# Altium PCB ESP32C6_module.PcbDoc (part 2 of 2)
Units mm, origin at the board's own origin, x right, y up, seen from the top; angles counter-clockwise.
Board outline 36.3 x 28.14 mm, 4 copper layers (TOP, GND, VCC, BOT), stack 1.586 mm thick; 77 components, 53 nets, 289 pads, 241 vias.
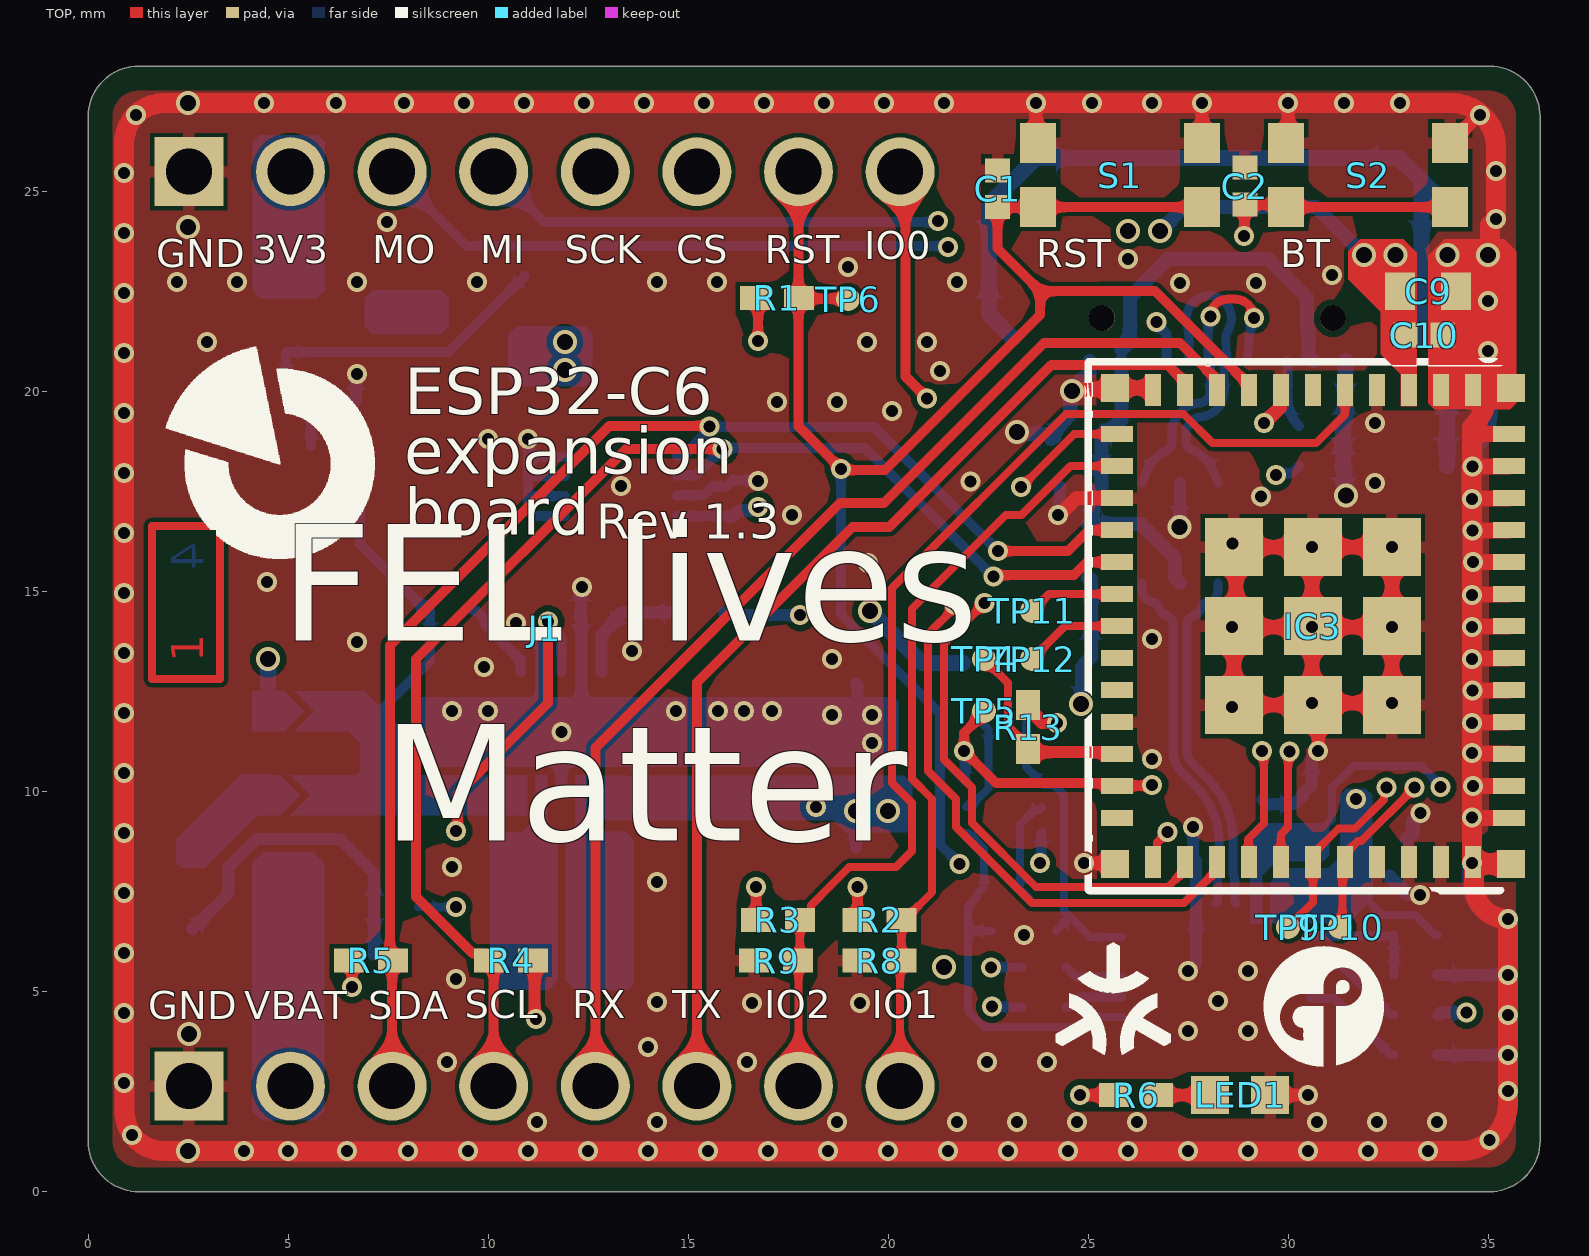
[diagram p0: TOP view]

## Via types
v1: diameter 0.5, hole 0.3, TOP to BOT, tented both sides, 203 vias
v2: diameter 0.6, hole 0.4, TOP to BOT, tented both sides, 22 vias
v3: diameter 0.5, hole 0.3, TOP to BOT, 16 vias

## Nets (pads, with @x,y where several pads share a name; then routed paths per layer and width w, separated by ;. In a path a pad name is that pad's centre, name@x,y a point inside that pad or via, vN(x,y) a via of type N, cw(c..) or ccw(c..) an arc to the next point about the centre after c; other vN are vias at no path point) (continued)
USB2_N: IC4.4 IC6.5 | length 8.8
  BOT w0.222: IC4.4 28.25,15.034 cw(c27.927,15.034) 28.155,14.805 cw(c27.927,15.034) 27.927,14.711 27.873,14.662 ccw(c28.022,14.497) 27.807,14.551 cw(c27.6,14.6) 27.646,14.393 ccw(c27.696,14.176) 27.474,14.176 27.474,13.951 27.474,11.004 ccw(c27.904,11.004) 27.475,10.983 ccw(c27.904,11.004) 27.492,10.883 ccw(c27.904,11.004) 27.6,10.7 27.995,10.305 cw(c26.477,8.786) 28.624,8.786 28.624,7.923 ccw(c28.687,7.923) 28.643,7.878 cw(c28.598,7.834) 28.661,7.834 28.661,7.294 ccw(c28.794,7.294) IC6.5
USB2_P: IC4.6 IC6.4 | length 8.8
  BOT w0.222: IC4.6 26.35,15.034 ccw(c26.673,15.034) 26.445,14.805 ccw(c26.673,15.034) 26.673,14.711 26.727,14.662 cw(c26.578,14.497) 26.793,14.55 ccw(c27,14.6) 26.933,14.398 26.974,14.385 cw(c26.904,14.174) 27.126,14.176 27.126,13.951 27.126,11.004 27.126,11.002 ccw(c27.9,11.002) 27.352,10.455 27.698,10.109 cw(c26.302,8.714) 28.276,8.714 28.276,7.923 cw(c28.213,7.923) 28.257,7.878 ccw(c28.302,7.834) 28.239,7.834 28.239,7.294 cw(c28.106,7.294) IC6.4
VBAT: J1.10 Q3.3
VBUS: C11.2 D3.1 FB1.1 IC4.5 J3.A4/B9 J3.B4/A9 | length 15.9
  BOT w0.35: FB1.1 FB1.1@25.025,16.675 ; C11.2 25.275,17.525 25.122,17.372 25.122,16.772 FB1.1@25.025,16.675 ; C11.2@25.333,17.617 25.333,18.933 25.425,19.025 25.566,19.025 25.83,19.289 J3.A4/B9 ; J3.A4/B9@25.83,21.025 26.053,21.249 26.053,22.353 27,23.3 29.513,23.3 30.47,22.343 30.47,21.556 30.505,21.521 30.505,20.875 J3.B4/A9 ; IC4.5 27.175,15.325 27.175,15.825 26.325,16.675 FB1.1@25.025,16.675
VIN: C4.1 IC2.5 IC2.8 R7.2 R11.1 SB1.2 SB2.2 TP1.1 | length 18.5
  TOP w0.25: v1(9.2,9) 9.241,9.041 9.241,9.941 11.5,12.2 v1(11.5,14.242)
  BOT w0.25: SB1.2@5.901,12.001 6.051,12.001 ; R11.1 6.8,16.175 8.475,14.5 R7.2 8.55,13.25 7.3,12 TP1.1 ; v1(9.2,9) 9.248,9.048 9.248,9.695 C4.1 ; v1(11.5,14.242) 11.5,14.174 11.831,13.844 IC2.8
pads on no net: IC3.6 IC3.19 IC3.20 IC3.24 IC6.1 IC6.2 IC6.10 IC6.12 IC6.13 IC6.14 IC6.15 IC6.16 IC6.17 IC6.18 IC6.19 IC6.20 IC6.21 IC6.22 IC6.23 IC6.27 J3. J3.A8 J3.B8
copper on no net: | length 44.2
  TOP w0.2: 1.6,12.8 1.6,16.629 3.3,16.629 3.3,12.8 1.6,12.8
  GND w0.2: 1.6,12.8 1.6,16.629 3.3,16.629 3.3,12.8 1.6,12.8
  VCC w0.2: 1.6,12.8 1.6,16.629 3.3,16.629 3.3,12.8 1.6,12.8
  BOT w0.2: 1.6,12.8 3.3,12.8 3.3,16.629 1.6,16.629 1.6,12.8

## Polygon pours and split planes (outlines as drawn)
GND on GND "NONET_L01_P-001" (solid, remove dead copper, pour order 2): 0,1.255 ccw(c1.27,1.255) 1.27,-0.015 35.03,-0.015 ccw(c35.03,1.255) 36.3,1.255 36.3,26.855 ccw(c35.03,26.855) 35.03,28.125 1.27,28.125 ccw(c1.27,26.855) 0,26.855
GND on BOT "NONET_L01_P-001" (solid, remove dead copper, pour order 0): 0,1.255 ccw(c1.27,1.255) 1.27,-0.015 35.03,-0.015 ccw(c35.03,1.255) 36.3,1.255 36.3,26.855 ccw(c35.03,26.855) 35.03,28.125 1.27,28.125 ccw(c1.27,26.855) 0,26.855
GND on TOP "NONET_L01_P-001" (solid, remove dead copper, pour order 4): 0,1.255 ccw(c1.27,1.255) 1.27,-0.015 35.03,-0.015 ccw(c35.03,1.255) 36.3,1.255 36.3,26.855 ccw(c35.03,26.855) 35.03,28.125 1.27,28.125 ccw(c1.27,26.855) 0,26.855
STAB_3V3 on VCC "NONET_L01_P-001" (solid, remove dead copper, pour order 3): 0,1.255 ccw(c1.27,1.255) 1.27,-0.015 35.03,-0.015 ccw(c35.03,1.255) 36.3,1.255 36.3,26.855 ccw(c35.03,26.855) 35.03,28.125 1.27,28.125 ccw(c1.27,26.855) 0,26.855

## Other copper
TOP:
  region net STAB_3V3: 31.8,23.8 31.5,23.5 31.5,22.8 32.32,21.98 32.32,20.925 32.82,20.425 32.82,19.625 33.22,19.625 33.22,23.461 32.881,23.8
  pour cut-out: 1.6,16.629 3.3,16.629 3.3,12.8 1.6,12.8
  pour cut-out: 1.6,12.8 1.6,16.629 3.3,16.629 3.3,12.8
  pour cut-out: 1.6,12.8 1.6,16.629 3.3,16.629 3.3,12.8
  region net GND: 33.5,19.7 33.5,23.4 33.9,23.8 35.4,23.8 35.7,23.5 35.7,19.7 35.55,19.55 33.65,19.55
  text "1" at 2.874,13.225 h0.8 r90
GND:
  pour cut-out: 1.6,16.629 3.3,16.629 3.3,12.8 1.6,12.8
  text "2" at 2.874,13.875 h0.8 r90
VCC:
  pour cut-out: 17.4,9.8 17.4,14.6 17.6,14.8 18,14.8 18.2,14.6 18.2,10.2 18.7,9.7 18.7,9.4 18.4,9.1 18.1,9.1
  pour cut-out: 1.6,16.629 3.3,16.629 3.3,12.8 1.6,12.8
  text "3" at 2.874,15.375 h0.8 r90
BOT:
  pour cut-out: 1.6,16.629 3.3,16.629 3.3,12.8 1.6,12.8
  pour cut-out: 1.6,16.629 3.3,16.629 3.3,12.8 1.6,12.8
  pour cut-out: 1.6,12.8 1.6,16.629 3.3,16.629 3.3,12.8
  region net NetIC2_2: 12.925,8.985 13.425,8.985 13.644,8.766 13.644,5.166 13.494,5.016 12.194,5.016 11.944,5.266 11.944,8.766 12.181,9.004 12.181,10.396 12.481,10.396 12.481,9.429
  region net NetIC2_4: 10.844,8.966 10.244,8.966 10.044,8.766 10.044,5.204 10.213,5.034 11.512,5.034 11.744,5.266 11.744,8.766 11.481,9.029 11.481,10.397 11.183,10.397 11.183,9.306
  region net NetQ1_3: 6.92,22.325 6.92,21.625 7.12,21.425 8.82,21.425 9.02,21.625 9.02,22.325 8.82,22.525 7.12,22.525
  region net NetQ3_2: 3.811,10.411 2.2,8.8 2.2,8.2 2.311,8.089 2.915,8.089 3.115,8.289 4.238,9.411 4.632,9.411 4.632,10.411
  region net VIN: 6.8,11.2 6.5,11.5 5.8,11.5 5.8,12.5 6.9,12.5 7.8,11.6 7.8,10.6 8,10.397 10.98,10.397 10.98,9.4 5.6,9.4 5.6,10.397 6.7,10.397 6.8,10.497
  region net STAB_3V3: 12.685,10.39 20.41,10.39 20.6,10.2 20.6,9.1 20.466,8.966 18.934,8.966 18.634,9.266 12.944,9.266 12.685,9.525
  region net STAB_3V3: 10.505,21.41 10.505,20.34 10.72,20.125 12.42,20.125 12.605,20.31 12.605,21.44 12.42,21.625 10.72,21.625
  region net GND: 20.103,10.603 20.25,10.75 20.25,12.25 20.155,12.345 8.323,12.345 8.144,12.166 8.144,10.866 8.406,10.603
  region net +5V: 29.55,6.7 29.55,7.725 29.9,8.075 31,8.075 31.3,8.375 31.3,9.906 31.453,10.059 31.947,10.059 32.1,9.906 32.1,7.3 31.5,6.7
  region net P3V3: 29.05,6.7 29.05,8.925 29.325,9.2 30.95,9.2 31.025,9.125 31.025,8.4 30.875,8.25 29.7,8.25 29.35,7.9 29.35,6.7
  region net 3V3_IN: 4.12,22.525 4.32,22.325 5.72,22.325 5.92,22.525 5.92,26.225 5.745,26.4 4.295,26.4 4.12,26.225
  region net VBAT: 5.9,8.2 5.623,8.477 4.38,8.477 4.1,8.197 4.1,2.003 4.325,1.777 5.675,1.777 5.9,2.003
  text "4" at 2.874,16.225 h0.8 r90

## Silkscreen, mask and mechanical layers (free items; w line width, h text height)
Top Overlay:
  drawing of 7 lines, arcs and shapes, not listed
  text "IO0" at 19.4,23.3 h0.7
  text "3V3" at 4.12,23.2 h0.7
  text "MO" at 7.1,23.2 h0.7
  text "MI" at 9.8,23.2 h0.7
  text "SCK" at 11.92,23.2 h0.7
  text "CS" at 14.7,23.2 h0.7
  text "RST" at 16.92,23.2 h0.7
  text "GND" at 1.7,23.1 h0.7
  text "RST" at 23.7,23.1 h0.7
  text "BT" at 29.8,23.1 h0.7
  text "ESP32-C6" at 7.9,19.028 h2
  text "expansion" at 7.9,17.552 h2
  text "board" at 7.9,16.019 h2
  text "Rev 1.3" at 12.7,16.019 h1.5
  text "FEL lives  /   Matter" at 4.8,7.8 h5
  text "SCL" at 9.42,4.325 h0.7
  text "RX" at 12.1,4.325 h0.7
  text "TX" at 14.6,4.325 h0.7
  text "IO2" at 16.9,4.325 h0.7
  text "IO1" at 19.593,4.325 h0.7
  text "GND" at 1.5,4.3 h0.7
  text "VBAT" at 3.9,4.3 h0.7
  text "SDA" at 7,4.3 h0.7
Bottom Overlay:
  region: 21.358,8.705 21.424,8.749 21.469,8.815 21.475,8.847 21.475,8.939 21.469,8.971 21.424,9.037 21.358,9.081 21.28,9.097 21.202,9.081 21.136,9.037 21.092,8.971 21.076,8.893 21.092,8.815 21.136,8.749 21.202,8.705 21.28,8.689
  region: 26.424,18.549 26.469,18.615 26.484,18.693 26.469,18.771 26.424,18.837 26.358,18.881 26.28,18.897 26.202,18.881 26.136,18.837 26.092,18.771 26.076,18.693 26.092,18.615 26.136,18.549 26.172,18.525 26.389,18.525
  region: 11.978,16.112 12.044,16.156 12.088,16.222 12.104,16.3 12.088,16.378 12.044,16.444 11.978,16.488 11.919,16.5 11.881,16.5 11.822,16.488 11.756,16.444 11.712,16.378 11.696,16.3 11.712,16.222 11.756,16.156 11.822,16.112 11.9,16.096
  region: 14.478,8.912 14.544,8.956 14.588,9.022 14.604,9.1 14.588,9.178 14.544,9.244 14.511,9.266 14.289,9.266 14.256,9.244 14.212,9.178 14.196,9.1 14.212,9.022 14.256,8.956 14.322,8.912 14.4,8.896
  lines w0.2: 21.07,14.348 ccw(c20.98,14.393) 21.07,14.348
  text "USB" at 3.7,11.7 h0.7
  text "VBAT" at 3.8,9.5 h0.7